# EAGLE board CT_schematic (EAGLE 7.6.0)

Size 100 x 80 mm. Coordinates in mm from the lower left corner, seen from the top.
Outline: 0,0 100,0 100,80 0,80 0,0
Copper layers (1*16): Top 0.035mm / dielectric 1.5mm / Bottom 0.035mm
Design rules "default": minimum track width 10mil, minimum drill 24mil, track to track 8mil, track to pad 8mil, pad to pad 8mil, via to via 8mil, smd to smd 8mil, copper to edge 40mil, drill to drill 8mil, minimum pad ring 10mil, minimum via ring 8mil, stop-mask expansion 4mil, vias tented up to drill 0mil, thermal gap 10mil

## Footprints (pad centres in the part's own frame; a part is rotated, then mirrored left to right if it is on the bottom)
C0603 = smd 0.8 x 0.8: 1 -0.762,0; 2 0.762,0
C0402 = smd 0.5 x 0.5: 1 -0.508,0; 2 0.508,0
C1210 = smd 1.2 x 2.5: 1 -1.524,0; 2 1.524,0
R0603 = smd 0.8 x 0.8: 1 -0.762,0; 2 0.762,0
EXV-9H = smd 3.505 x 1.676: 1 -2.857,0; 2 2.857,0
L0603 = smd 0.8 x 0.8: 1 -0.762,0; 2 0.762,0
IND25X25CZ = smd 2.489 x 3.429: 1 -2.718,0; 2 2.718,0
DR1040 = smd 1.6 x 3.2: 1 -4.458,0; 2 4.458,0
PJ-037B_PACKAGE = drill 3.7 square: 1 12,0 | drill 3.2 square: 2 6,0
UFBGA176_25 = smd 0.3 x 0.3: A1 -4.55,4.55; A2 -3.9,4.55; A3 -3.25,4.55; A4 -2.6,4.55; A5 -1.95,4.55; A6 -1.3,4.55; A7 -0.65,4.55; A8 0,4.55; A9 0.65,4.55; A10 1.3,4.55; A11 1.95,4.55; A12 2.6,4.55; A13 3.25,4.55; A14 3.9,4.55; A15 4.55,4.55; B1 -4.55,3.9; B2 -3.9,3.9; B3 -3.25,3.9; B4 -2.6,3.9; B5 -1.95,3.9; B6 -1.3,3.9; B7 -0.65,3.9; B8 0,3.9; B9 0.65,3.9; B10 1.3,3.9; B11 1.95,3.9; B12 2.6,3.9; B13 3.25,3.9; B14 3.9,3.9; B15 4.55,3.9; C1 -4.55,3.25; C2 -3.9,3.25; C3 -3.25,3.25; C4 -2.6,3.25; C5 -1.95,3.25; C6 -1.3,3.25; C7 -0.65,3.25; C8 0,3.25; C9 0.65,3.25; C10 1.3,3.25; C11 1.95,3.25; C12 2.6,3.25; C13 3.25,3.25; C14 3.9,3.25; C15 4.55,3.25; D1 -4.55,2.6; D2 -3.9,2.6; D3 -3.25,2.6; D4 -2.6,2.6; D5 -1.95,2.6; D6 -1.3,2.6; D7 -0.65,2.6; D8 0,2.6; D9 0.65,2.6; D10 1.3,2.6; D11 1.95,2.6; D12 2.6,2.6; D13 3.25,2.6; D14 3.9,2.6; D15 4.55,2.6; E1 -4.55,1.95; E2 -3.9,1.95; E3 -3.25,1.95; E4 -2.6,1.95; E12 2.6,1.95; E13 3.25,1.95; E14 3.9,1.95; E15 4.55,1.95; F1 -4.55,1.3; F2 -3.9,1.3; F3 -3.25,1.3; F4 -2.6,1.3; F6 -1.3,1.3; F7 -0.65,1.3; F8 0,1.3; F9 0.65,1.3; F10 1.3,1.3; F12 2.6,1.3; F13 3.25,1.3; F14 3.9,1.3; F15 4.55,1.3; G1 -4.55,0.65; G2 -3.9,0.65; G3 -3.25,0.65; G4 -2.6,0.65; G6 -1.3,0.65; G7 -0.65,0.65; G8 0,0.65; G9 0.65,0.65; G10 1.3,0.65; G12 2.6,0.65; G13 3.25,0.65; G14 3.9,0.65; G15 4.55,0.65; H1 -4.55,0; H2 -3.9,0; H3 -3.25,0; H4 -2.6,0; H6 -1.3,0; H7 -0.65,0; H8 0,0; H9 0.65,0; H10 1.3,0; H12 2.6,0; H13 3.25,0; H14 3.9,0; H15 4.55,0; J1 -4.55,-0.65; J2 -3.9,-0.65; J3 -3.25,-0.65; J4 -2.6,-0.65; J6 -1.3,-0.65; J7 -0.65,-0.65; J8 0,-0.65; J9 0.65,-0.65; J10 1.3,-0.65; J12 2.6,-0.65; J13 3.25,-0.65; J14 3.9,-0.65; J15 4.55,-0.65; K1 -4.55,-1.3; K2 -3.9,-1.3; K3 -3.25,-1.3; K4 -2.6,-1.3; K6 -1.3,-1.3; K7 -0.65,-1.3; K8 0,-1.3; K9 0.65,-1.3; K10 1.3,-1.3; K12 2.6,-1.3; K13 3.25,-1.3; K14 3.9,-1.3; K15 4.55,-1.3; L1 -4.55,-1.95; L2 -3.9,-1.95; L3 -3.25,-1.95; L4 -2.6,-1.95; L12 2.6,-1.95; L13 3.25,-1.95; L14 3.9,-1.95; L15 4.55,-1.95; M1 -4.55,-2.6; M2 -3.9,-2.6; M3 -3.25,-2.6; M4 -2.6,-2.6; M5 -1.95,-2.6; M6 -1.3,-2.6; M7 -0.65,-2.6; M8 0,-2.6; M9 0.65,-2.6; M10 1.3,-2.6; M11 1.95,-2.6; M12 2.6,-2.6; M13 3.25,-2.6; M14 3.9,-2.6; M15 4.55,-2.6; N1 -4.55,-3.25; N2 -3.9,-3.25; N3 -3.25,-3.25; N4 -2.6,-3.25; N5 -1.95,-3.25; N6 -1.3,-3.25; N7 -0.65,-3.25; N8 0,-3.25; N9 0.65,-3.25; N10 1.3,-3.25; N11 1.95,-3.25; N12 2.6,-3.25; N13 3.25,-3.25; N14 3.9,-3.25; N15 4.55,-3.25; P1 -4.55,-3.9; P2 -3.9,-3.9; P3 -3.25,-3.9; P4 -2.6,-3.9; P5 -1.95,-3.9; P6 -1.3,-3.9; P7 -0.65,-3.9; P8 0,-3.9; P9 0.65,-3.9; P10 1.3,-3.9; P11 1.95,-3.9; P12 2.6,-3.9; P13 3.25,-3.9; P14 3.9,-3.9; P15 4.55,-3.9; R1 -4.55,-4.55; R2 -3.9,-4.55; R3 -3.25,-4.55; R4 -2.6,-4.55; R5 -1.95,-4.55; R6 -1.3,-4.55; R7 -0.65,-4.55; R8 0,-4.55; R9 0.65,-4.55; R10 1.3,-4.55; R11 1.95,-4.55; R12 2.6,-4.55; R13 3.25,-4.55; R14 3.9,-4.55; R15 4.55,-4.55
A2200-A = smd 1.5 x 0.8: 1 -4.85,6.35; 2 -4.85,5.08; 3 -4.85,3.81; 4 -4.85,2.54; 5 -4.85,1.27; 6 -4.85,0; 7 -4.85,-1.27; 8 -4.85,-2.54; 9 -4.85,-3.81; 10 -4.85,-5.08; 11 -4.85,-6.35; 12 4.85,-6.35; 13 4.85,-5.08; 14 4.85,-3.81; 15 4.85,-2.54; 16 4.85,-1.27; 17 4.85,0; 18 4.85,1.27; 19 4.85,2.54; 20 4.85,3.81; 21 4.85,5.08; 22 4.85,6.35 | smd 1.2 x 1.2: 23 -2,2; 24 -2,0; 25 -2,-2; 26 0,-2; 27 0,0; 28 0,2; 29 2,2; 30 2,0; 31 2,-2
COAXIAL_C = smd 1 x 1: 1 0,-1.5; 2 0,1.5 | smd 1.05 x 2.2: 3 -1.475,0; 4 1.475,0
AT24C02D = smd 1.6 x 0.6: 1 -2.475,1.905 | smd 1.55 x 0.6: 2 -2.475,0.635; 3 -2.475,-0.635; 4 -2.475,-1.905; 5 2.475,-1.905; 6 2.475,-0.635; 7 2.475,0.635; 8 2.475,1.905
PC28F512P33BFD = smd 0.45 x 0.45: A1 0,0; A2 1,0; A3 2,0; A4 3,0; A5 4,0; A6 5,0; A7 6,0; A8 7,0; B1 0,-1; B2 1,-1; B3 2,-1; B4 3,-1; B5 4,-1; B6 5,-1; B7 6,-1; B8 7,-1; C1 0,-2; C2 1,-2; C3 2,-2; C4 3,-2; C5 4,-2; C6 5,-2; C7 6,-2; C8 7,-2; D1 0,-3; D2 1,-3; D3 2,-3; D4 3,-3; D5 4,-3; D6 5,-3; D7 6,-3; D8 7,-3; E1 0,-4; E2 1,-4; E3 2,-4; E4 3,-4; E5 4,-4; E6 5,-4; E7 6,-4; E8 7,-4; F1 0,-5; F2 1,-5; F3 2,-5; F4 3,-5; F5 4,-5; F6 5,-5; F7 6,-5; F8 7,-5; G1 0,-6; G2 1,-6; G3 2,-6; G4 3,-6; G5 4,-6; G6 5,-6; G7 6,-6; G8 7,-6; H1 0,-7; H2 1,-7; H3 2,-7; H4 3,-7; H5 4,-7; H6 5,-7; H7 6,-7; H8 7,-7
USON-8 = smd 0.3 x 0.4: 1 0,0; 2 0.5,0; 3 1,0; 4 1.5,0; 5 1.5,2.4; 6 1,2.4; 7 0.5,2.4; 8 0,2.4 | smd 1.65 x 0.25: 9 0.75,1.2
ABLS-25.000MHZ-B2F-T = smd 5.6 x 2.8: 1 -3.81,0; 2 5.69,0
ASEK = smd 1.4 x 1: 1 -1.1,-0.8; 2 1.1,-0.8; 3 1.1,0.8; 4 -1.1,0.8
IR3899MTR1PBF = smd 0.25 x 0.75: 1 0,0; 2 0.5,0; 3 1,0; 4 1.5,0; 5 2,0; 6 2.5,0; 7 3,0 | smd 0.75 x 0.25: 8 3.425,0.78; 9 3.425,1.28; 10 3.425,1.78; 14 -0.425,1.78; 15 -0.425,1.28; 16 -0.425,0.78 | smd 0.3 x 1.95: 11 3.22,3.63 | smd 1.62 x 2.42: 12 1.786,3.8 | smd 1 x 1.95: 13 0.117,3.63 | smd 2.19 x 1.25: 17 1.51,1.26
HTSSOP14 = smd 1.676 x 0.356: 1 -2.8,1.95; 2 -2.8,1.3; 3 -2.8,0.65; 4 -2.8,0; 5 -2.8,-0.65; 6 -2.8,-1.3; 7 -2.8,-1.95; 8 2.8,-1.95; 9 2.8,-1.3; 10 2.8,-0.65; 11 2.8,0; 12 2.8,0.65; 13 2.8,1.3; 14 2.8,1.95 | smd 3 x 5: 15 0,0 | drill 0.4 pad 0.45: P$1 -0.75,1.5; P$2 0.75,1.5; P$3 -0.75,0; P$4 0.8,0; P$5 -0.75,-1.5; P$6 0.9,-1.5
SOIC-8_EP = smd 1.6 x 0.533: 1 -2.921,1.905; 2 -2.921,0.635; 3 -2.921,-0.635; 4 -2.921,-1.905; 5 2.921,-1.905; 6 2.921,-0.635; 7 2.921,0.635; 8 2.921,1.905 | smd 2.54 x 3.302: EPAD 0,0 | drill 0.406 pad 0.406: P$1 -0.508,0.635; P$2 0.381,0.635; P$3 -0.508,-0.635; P$4 0.381,-0.635
QFN-38_UHF = smd 0.75 x 0.3: 1 -2.4,2.75; 2 -2.4,2.25; 3 -2.4,1.75; 4 -2.4,1.25; 6 -2.4,0.25; 7 -2.4,-0.25; 8 -2.4,-0.75; 9 -2.4,-1.25; 10 -2.4,-1.75; 11 -2.4,-2.25; 12 -2.4,-2.75; 20 2.4,-2.75; 21 2.4,-2.25; 22 2.4,-1.75; 23 2.4,-1.25; 24 2.4,-0.75; 25 2.4,-0.25; 26 2.4,0.25; 27 2.4,0.75; 28 2.4,1.25; 29 2.4,1.75; 30 2.4,2.25; 31 2.4,2.75 | smd 0.758 x 0.3: 5 -2.4,0.75 | smd 0.3 x 0.75: 13 -1.5,-3.4; 14 -1,-3.4; 15 -0.5,-3.4; 16 0,-3.4; 17 0.5,-3.4; 18 1,-3.4; 19 1.5,-3.4; 32 1.5,3.4; 33 1,3.4; 34 0.5,3.4; 35 0,3.4; 36 -0.5,3.4; 37 -1,3.4; 38 -1.5,3.4 | smd 3.2 x 5.2: 39 0,0
IRF8306MTRPBF = smd 0.9 x 1.85: 1 0,0; 2 0,-2.35; 6 6.4,0; 7 6.4,-2.35 | smd 0.75 x 0.75: 3 1.75,-1.175 | smd 1.45 x 0.87: 4 3.5,-0.565; 5 3.5,-1.785
DCU0008A_N = smd 0.5 x 0.3: 1 -1.6,0.75; 2 -1.6,0.25; 3 -1.6,-0.25; 4 -1.6,-0.75; 5 1.6,-0.75; 6 1.6,-0.25; 7 1.6,0.25; 8 1.6,0.75
SW_4-1437565-2 = smd 1.4 x 2.1: 1 -2.23,4.55; 2 -2.23,-4.55; 3 2.23,4.55; 4 2.23,-4.55
LGM67K-G1J2-24-Z = smd 0.8 x 1.4: A -2,0; C 0,0
NC7SZ125M5X = smd 1.3 x 0.7: 1 -1.3,0.95; 2 -1.3,0; 3 -1.3,-0.95; 4 1.3,-0.95; 5 1.3,0.95
DUMMY_PACKAGE_318 = drill 0.3: 1 0,-1; 2 1.5,-1; 3 3,-1

## Placement (x,y rotation side)
C1  1e-06  [C0603]  -30.48,77.47 0 top  (outside the outline)
C2  1e-07  [C0603]  -34.29,77.47 0 top  (outside the outline)
C3  1e-07  [C0603]  -38.1,77.47 0 top  (outside the outline)
C4  1e-07  [C0603]  -41.91,77.47 0 top  (outside the outline)
C5  1e-07  [C0603]  -45.72,77.47 0 top  (outside the outline)
C6  1e-07  [C0603]  -49.53,77.47 0 top  (outside the outline)
C7  1e-07  [C0603]  -53.34,77.47 0 top  (outside the outline)
C8  1e-07  [C0603]  -57.15,77.47 0 top  (outside the outline)
C9  1e-07  [C0603]  -60.96,77.47 0 top  (outside the outline)
C10  1e-07  [C0603]  -64.77,77.47 0 top  (outside the outline)
C11  1e-07  [C0603]  -68.58,77.47 0 top  (outside the outline)
C12  1e-07  [C0603]  -72.39,77.47 0 top  (outside the outline)
C13  1e-07  [C0603]  -76.2,77.47 0 top  (outside the outline)
C14  1e-07  [C0603]  -80.01,77.47 0 top  (outside the outline)
C15  1e-07  [C0603]  -83.82,77.47 0 top  (outside the outline)
C16  1e-07  [C0603]  -87.63,77.47 0 top  (outside the outline)
C17  4.7e-06  [C0603]  -15.24,77.47 0 top  (outside the outline)
C18  1e-07  [C0603]  -15.24,82.55 0 top  (outside the outline)
C19  1e-08  [C0603]  -19.05,82.55 0 top  (outside the outline)
C20  1e-06  [C0603]  -22.86,82.55 0 top  (outside the outline)
C21  1e-07  [C0603]  -26.67,82.55 0 top  (outside the outline)
C22  1e-07  [C0603]  -30.48,82.55 0 top  (outside the outline)
C23  1e-07  [C0603]  -34.29,82.55 0 top  (outside the outline)
C24  1e-11  [C0402]  -15.24,87.63 0 top  (outside the outline)
C25  1e-11  [C0402]  -19.05,87.63 0 top  (outside the outline)
C26  1e-07  [C0402]  -22.86,87.63 0 top  (outside the outline)
C27  1e-08  [C0402]  -26.67,87.63 0 top  (outside the outline)
C28  1e-07  [C0402]  -30.48,87.63 0 top  (outside the outline)
C29  1e-08  [C0402]  -34.29,87.63 0 top  (outside the outline)
C30  1e-07  [C0402]  -38.1,87.63 0 top  (outside the outline)
C31  1e-08  [C0402]  -41.91,87.63 0 top  (outside the outline)
C32  1e-07  [C0402]  -45.72,87.63 0 top  (outside the outline)
C33  1e-08  [C0402]  -49.53,87.63 0 top  (outside the outline)
C34  1e-07  [C0402]  -53.34,87.63 0 top  (outside the outline)
C35  1e-08  [C0402]  -57.15,87.63 0 top  (outside the outline)
C36  0.0001  [C1210]  -85.09,43.18 0 top  (outside the outline)
C37  2.2e-06  [C0603]  -19.05,77.47 0 top  (outside the outline)
C38  1e-07  [C0402]  -60.96,87.63 0 top  (outside the outline)
C39  1e-07  [C0402]  -64.77,87.63 0 top  (outside the outline)
C40  8.6971073877236e-09  [R0603]  -20.32,57.15 0 top  (outside the outline)
C41  2.9649229730876e-07  [R0603]  -30.48,57.15 0 top  (outside the outline)
C44  1e-06  [C0603]  -38.1,82.55 0 top  (outside the outline)
C45  3.3e-09  [C0402]  -88.9,82.55 0 top  (outside the outline)
C46  1e-07  [C0402]  -68.58,87.63 0 top  (outside the outline)
C47  2.2e-05  [C1210]  -16.51,52.07 0 top  (outside the outline)
C48  2.2e-05  [C1210]  -22.86,52.07 0 top  (outside the outline)
C49  1e-05  [C1210]  -29.21,52.07 0 top  (outside the outline)
C50  1e-05  [C1210]  -35.56,52.07 0 top  (outside the outline)
C51  1e-05  [C1210]  -41.91,52.07 0 top  (outside the outline)
C52  1e-05  [C1210]  -48.26,52.07 0 top  (outside the outline)
C53  1e-05  [C1210]  -54.61,52.07 0 top  (outside the outline)
C54  1e-05  [C1210]  -60.96,52.07 0 top  (outside the outline)
C55  0.0001  [C1210]  -67.31,52.07 0 top  (outside the outline)
C56  2.2e-06  [C0603]  -22.86,77.47 0 top  (outside the outline)
C57  1e-07  [C0402]  -72.39,87.63 0 top  (outside the outline)
C58  1e-07  [C0402]  -76.2,87.63 0 top  (outside the outline)
C59  8.6971073877236e-09  [R0603]  -40.64,57.15 0 top  (outside the outline)
C60  2.9649229730876e-07  [R0603]  -50.8,57.15 0 top  (outside the outline)
C63  1e-07  [C0402]  -80.01,87.63 0 top  (outside the outline)
C64  2.2e-06  [C0603]  -26.67,77.47 0 top  (outside the outline)
C65  2.45e-08  [R0603]  -20.32,67.31 0 top  (outside the outline)
C66  2.8258362168397e-09  [R0603]  -60.96,57.15 0 top  (outside the outline)
C67  7.105e-09  [R0603]  -69.85,62.23 0 top  (outside the outline)
C68  0.0001  [EXV-9H]  -73.66,35.56 0 top  (outside the outline)
C69  0.0001  [EXV-9H]  -85.09,35.56 0 top  (outside the outline)
C70  1e-08  [C0402]  -83.82,87.63 0 top  (outside the outline)
C71  1e-07  [C0402]  -87.63,87.63 0 top  (outside the outline)
C72  1e-08  [C0402]  -15.24,92.71 0 top  (outside the outline)
C73  1e-07  [C0402]  -19.05,92.71 0 top  (outside the outline)
C74  1e-08  [C0402]  -22.86,92.71 0 top  (outside the outline)
C75  1e-08  [C0402]  -26.67,92.71 0 top  (outside the outline)
C76  1e-08  [C0402]  -30.48,92.71 0 top  (outside the outline)
F1  240.0  [L0603]  -41.91,82.55 0 top  (outside the outline)
I1  6.8e-07  [IND25X25CZ]  -38.1,44.45 0 top  (outside the outline)
I2  7e-06  [DR1040]  -19.05,25.4 0 top  (outside the outline)
I3  6.8e-07  [IND25X25CZ]  -46.99,44.45 0 top  (outside the outline)
J1  PJ-037B  [PJ-037B_PACKAGE]  -54.61,7.62 0 top  (outside the outline)
R2  1000.0  [R0603]  -45.72,82.55 0 top  (outside the outline)
R7  4700.0  [R0603]  -49.53,82.55 0 top  (outside the outline)
R8  4700.0  [R0603]  -53.34,82.55 0 top  (outside the outline)
R9  4700.0  [R0603]  -57.15,82.55 0 top  (outside the outline)
R14  2200.0  [R0603]  -60.96,82.55 0 top  (outside the outline)
R16  2200.0  [R0603]  -64.77,82.55 0 top  (outside the outline)
R18  10000.0  [R0603]  -25.4,67.31 0 top  (outside the outline)
R19  10000.0  [R0603]  -30.48,67.31 0 top  (outside the outline)
R20  10000.0  [R0603]  -35.56,67.31 0 top  (outside the outline)
R21  10000.0  [R0603]  -40.64,67.31 0 top  (outside the outline)
R22  10000.0  [R0603]  -45.72,67.31 0 top  (outside the outline)
R23  10000.0  [R0603]  -50.8,67.31 0 top  (outside the outline)
R24  10000.0  [R0603]  -55.88,67.31 0 top  (outside the outline)
R25  10000.0  [R0603]  -60.96,67.31 0 top  (outside the outline)
R26  10000.0  [R0603]  -66.04,67.31 0 top  (outside the outline)
R27  10000.0  [R0603]  -71.12,67.31 0 top  (outside the outline)
R28  10000.0  [R0603]  -76.2,67.31 0 top  (outside the outline)
R29  10000.0  [R0603]  -81.28,67.31 0 top  (outside the outline)
R30  10000.0  [R0603]  -86.36,67.31 0 top  (outside the outline)
R31  100000.0  [R0603]  -74.93,62.23 0 top  (outside the outline)
R32  100000.0  [R0603]  -80.01,62.23 0 top  (outside the outline)
R33  100000.0  [R0603]  -85.09,62.23 0 top  (outside the outline)
R34  0.1  [R0603]  -68.58,82.55 0 top  (outside the outline)
R35  4030.2416170974  [R0603]  -68.58,57.15 0 top  (outside the outline)
R36  2878.7440122125  [R0603]  -76.2,57.15 0 top  (outside the outline)
R37  58.613333333333  [R0603]  -83.82,57.15 0 top  (outside the outline)
R38  130.0  [R0603]  -72.39,82.55 0 top  (outside the outline)
R39  39000.0  [R0603]  -15.24,72.39 0 top  (outside the outline)
R40  49900.0  [R0603]  -20.32,72.39 0 top  (outside the outline)
R41  5147.5789473684  [R0603]  -19.05,62.23 0 top  (outside the outline)
R42  30000.0  [R0603]  -25.4,72.39 0 top  (outside the outline)
R43  22000.0  [R0603]  -30.48,72.39 0 top  (outside the outline)
R44  4031.5447154472  [R0603]  -26.67,62.23 0 top  (outside the outline)
R45  2200.0  [R0603]  -76.2,82.55 0 top  (outside the outline)
R46  0.1  [R0603]  -80.01,82.55 0 top  (outside the outline)
R47  4030.2416170974  [R0603]  -34.29,62.23 0 top  (outside the outline)
R48  2878.7440122125  [R0603]  -41.91,62.23 0 top  (outside the outline)
R49  58.613333333333  [R0603]  -49.53,62.23 0 top  (outside the outline)
R50  130.0  [R0603]  -83.82,82.55 0 top  (outside the outline)
R51  39000.0  [R0603]  -35.56,72.39 0 top  (outside the outline)
R52  49900.0  [R0603]  -40.64,72.39 0 top  (outside the outline)
R53  5147.5789473684  [R0603]  -57.15,62.23 0 top  (outside the outline)
R54  10000.0  [R0603]  -45.72,72.39 0 top  (outside the outline)
R55  75000.0  [R0603]  -50.8,72.39 0 top  (outside the outline)
R56  10000.0  [R0603]  -55.88,72.39 0 top  (outside the outline)
R57  10000.0  [R0603]  -60.96,72.39 0 top  (outside the outline)
R58  95300.0  [R0603]  -66.04,72.39 0 top  (outside the outline)
R59  95300.0  [R0603]  -71.12,72.39 0 top  (outside the outline)
R60  10000.0  [R0603]  -76.2,72.39 0 top  (outside the outline)
R61  10000.0  [R0603]  -81.28,72.39 0 top  (outside the outline)
R62  10000.0  [R0603]  -86.36,72.39 0 top  (outside the outline)
R63  139872.72727273  [R0603]  -64.77,62.23 0 top  (outside the outline)
R64  200000.0  [R0603]  -15.24,67.31 0 top  (outside the outline)
U1  STM32F777IIK7  [UFBGA176_25]  -31.75,6.35 0 top  (outside the outline)
U2  A2200-A  [A2200-A]  -19.05,10.16 0 top  (outside the outline)
U3  73412-0114  [COAXIAL_C]  -36.83,35.56 0 top  (outside the outline)
U4  AT24C02D-SSHM-T  [AT24C02D]  -67.31,24.13 0 top  (outside the outline)
U5  PC28F512P33BFD  [PC28F512P33BFD]  -71.12,10.16 0 top  (outside the outline)
U6  SST26WF080BT-104I/NP  [USON-8]  -34.29,91.44 0 top  (outside the outline)
U7  ABLS-25.000MHZ-B2F-T  [ABLS-25.000MHZ-B2F-T]  -26.67,44.45 0 top  (outside the outline)
U8  ASEK-32.768KHz-ECST  [ASEK]  -64.77,35.56 0 top  (outside the outline)
U9  IR3899MTR1PBF  [IR3899MTR1PBF]  -36.83,22.86 0 top  (outside the outline)
U10  tps54225PWP  [HTSSOP14]  -64.77,43.18 0 top  (outside the outline)
U11  MIC5234YME  [SOIC-8_EP]  -55.88,43.18 0 top  (outside the outline)
U12  IR3899MTR1PBF  [IR3899MTR1PBF]  -52.07,22.86 0 top  (outside the outline)
U13  LTC2928CUHF#PBF  [QFN-38_UHF]  -43.18,35.56 0 top  (outside the outline)
U14  IRF8306MTRPbF  [IRF8306MTRPBF]  -85.09,25.4 0 top  (outside the outline)
U15  IRF8306MTRPbF  [IRF8306MTRPBF]  -26.67,36.83 0 top  (outside the outline)
U16  LSF0102DCTR  [DCU0008A_N]  -52.07,91.44 0 top  (outside the outline)
U17  4-1437565-2  [SW_4-1437565-2]  -87.63,6.35 0 top  (outside the outline)
U18  Q65110A2395  [LGM67K-G1J2-24-Z]  -73.66,43.18 0 top  (outside the outline)
U19  nc7sz125m5x  [NC7SZ125M5X]  -72.39,50.8 0 top  (outside the outline)
U20  nc7sz125m5x  [NC7SZ125M5X]  -78.74,50.8 0 top  (outside the outline)
U21  nc7sz125m5x  [NC7SZ125M5X]  -85.09,50.8 0 top  (outside the outline)
U22  Dummy  [DUMMY_PACKAGE_318]  -39.37,92.71 0 top  (outside the outline)

## Library data of the parts
C1-C41 C44-C60 C63-C76 F1 I1-I3 J1 R2 R7-R9 R14 R16 R18-R64 U1-U22 = circuit_tree

## Nets
CLK_CRYSTAL_U1_G1: C24.1 U1.G1 U7.1
CLK_CRYSTAL_U1_H1: C25.1 U1.H1 U7.2
CLK_U1_E1: U1.E1 U8.3
GND: C1.2 C2.2 C3.2 C4.2 C5.2 C6.2 C7.2 C8.2 C9.2 C10.2 C11.2 C12.2 C13.2 C14.2 C15.2 C16.2 C17.2 C18.2 C19.2 C20.2 C21.2 C22.2 C23.2 C24.2 C25.2 C26.2 C27.2 C28.2 C29.2 C30.2 C31.2 C32.2 C33.2 C34.2 C35.2 C37.2 C38.2 C39.2 C44.2 C45.2 C47.2 C48.2 C49.2 C50.2 C51.2 C52.2 C53.2 C54.2 C56.2 C57.2 C58.2 C63.2 C64.2 C65.2 C66.2 C67.2 C68.2 C69.2 C70.2 C71.2 C72.2 C73.2 C74.2 C75.2 C76.2 J1.2 R2.2 R18.2 R22.2 R24.2 R25.2 R34.1 R34.2 R36.2 R39.2 R41.2 R43.2 R45.2 R46.1 R46.2 R48.2 R51.2 R53.2 R55.2 R58.2 R59.2 R60.2 R61.2 R62.2 U1.D5 U1.D7 U1.D8 U1.D9 U1.F2 U1.F6 U1.F7 U1.F8 U1.F9 U1.F10 U1.F12 U1.G2 U1.G6 U1.G7 U1.G8 U1.G9 U1.G10 U1.G12 U1.H6 U1.H7 U1.H8 U1.H9 U1.H10 U1.H12 U1.J6 U1.J7 U1.J8 U1.J9 U1.J10 U1.K6 U1.K7 U1.K8 U1.K9 U1.K10 U1.M1 U1.M8 U1.M9 U1.N1 U2.7 U2.8 U2.23 U2.24 U2.25 U2.26 U2.27 U2.28 U2.29 U2.30 U2.31 U4.4 U5.B2 U5.H2 U5.H4 U5.H6 U6.4 U6.9 U8.2 U9.4 U9.11 U9.17 U10.5 U10.8 U10.9 U10.15 U11.7 U11.EPAD U12.4 U12.11 U12.17 U13.8 U13.9 U13.10 U13.12 U13.13 U13.24 U13.25 U13.30 U13.32 U13.39 U16.1 U18.C U19.1 U19.3 U20.1 U20.3 U21.1 U21.3 U22.1
NET_U1_A5: U16.4
NET_U1_B4: U16.3
NET_U1_C6: R19.1 U1.C6
NET_U1_D6: R18.1 U1.D6
NET_U1_F13: C23.1 U1.F13
NET_U1_H4: R14.1 U1.H4 U4.6
NET_U1_J1: R9.1 U1.J1 U21.4
NET_U1_J4: R16.1 U1.J4 U4.5
NET_U1_L4: R20.1 U1.L4
NET_U1_R1: C19.1 C20.1 F1.1 U1.P1 U1.R1
NET_U1_R14: U18.A
NET_U1_R15: U17.3 U17.4
NET_U2_2: R21.2 U2.2
NET_U2_6: U2.6
NET_U2_17: R21.1 U2.17
NET_U2_19: U2.19
NET_U2_22: R8.1 U2.22 U20.4
NET_U3_1: U2.11 U3.1
NET_U3_2: U2.10 U3.2 U3.3 U3.4
NET_U4_1: R23.1 U4.1
NET_U4_2: R24.1 U4.2
NET_U4_3: R25.1 U4.3
NET_U4_7: R22.1 U4.7
NET_U5_A4: C32.1 C33.1 U5.A4
NET_U5_B4: R27.1 U5.B4
NET_U5_C6: R29.1 U5.C6
NET_U5_D4: R7.1 U5.D4 U19.4
NET_U5_F6: R26.1 U5.F6
NET_U5_F8: R28.1 U5.F8
NET_U5_G8: R30.1 U5.G8
NET_U9_1: C40.1 R35.1 R36.1 R37.1 R38.1 U9.1 U9.8
NET_U9_2: C39.1 U9.2
NET_U9_3: C40.2 C41.1 C41.2 U9.3
NET_U9_5: R39.1 U9.5
NET_U9_10: C37.1 U9.10
NET_U9_12: C36.1 I1.1 U9.12
NET_U9_13: U9.13
NET_U9_14: C36.2 U9.14
NET_U9_15: R40.1 R41.1 U9.15
NET_U9_ATNET_3: I1.2 R35.2
NET_U9_ATNET_4: C41.2 R37.2
NET_U9_ATNET_5: R38.2
NET_U10_2: R42.2 R43.1 U10.2
NET_U10_3: C44.1 U10.3
NET_U10_4: C45.1 U10.4
NET_U10_10: C46.1 I2.1 U10.10 U10.11
NET_U10_12: C46.2 U10.12
NET_U11_4: R44.2 R45.1 U11.4
NET_U12_1: C59.1 R47.1 R48.1 R49.1 R50.1 U12.1 U12.8
NET_U12_2: C58.1 U12.2
NET_U12_3: C59.2 C60.1 C60.2 U12.3
NET_U12_5: R51.1 U12.5
NET_U12_10: C56.1 U12.10
NET_U12_12: C55.1 I3.1 U12.12
NET_U12_13: U12.13
NET_U12_14: C55.2 U12.14
NET_U12_15: R52.1 R53.1 U12.15
NET_U12_ATNET_3: I3.2 R47.2
NET_U12_ATNET_4: C60.2 R49.2
NET_U12_ATNET_5: R50.2
NET_U13_3: R61.1 U13.3
NET_U13_6: R58.1 U13.6
NET_U13_7: R59.1 U13.7
NET_U13_16: R60.1 R63.1 U13.16
NET_U13_18: R57.1 U13.18
NET_U13_19: R56.1 U13.19 U13.20
NET_U13_21: R54.1 R55.1 U13.21 U19.2 U20.2 U21.2
NET_U13_26: C66.1 U13.26
NET_U13_27: C65.1 U13.27
NET_U13_28: C67.1 U13.28
NET_U13_38: R62.1 U13.38
NET_U14_3: U13.2 U14.3
NET_U15_3: U13.37 U15.3
NET_U16_8: R64.1 U16.8
NET_U17_1: R2.1 U17.1 U17.2
PROC_I2C1_SCL_TOXCVR: U2.15 U16.5
PROC_I2C1_SDA_TOXCVR: U2.16 U16.6
PROC_PE2: U1.A2 U22.3
PROC_PE3: U1.A1 U22.2
PROC_QUADSPI_BK1_IO0: U1.F14 U6.5
PROC_QUADSPI_BK1_IO1: U1.B14 U6.2
PROC_QUADSPI_BK1_IO2: R32.1 U1.K1 U6.3
PROC_QUADSPI_BK1_IO3: R33.1 U1.K2 U6.7
PROC_QUADSPI_BK1_NCS: R31.1 U1.B6 U6.1
PROC_QUADSPI_CLK: U1.L1 U6.6
VCC_16V8: C63.1 C64.1 C68.1 C69.1 J1.1 R54.2 R56.2 R57.2 R63.2 U13.11 U13.22 U14.1 U14.2 U14.6 U14.7 U15.1 U15.2 U15.6 U15.7
VCC_S1_16V8: C38.1 C49.1 C50.1 C51.1 C52.1 R40.2 U9.9 U10.7 U10.13 U10.14 U11.5 U11.8 U14.4 U14.5
VCC_S2_16V8: C57.1 R52.2 U12.9 U15.4 U15.5
VCC_TIER1_1V2: C22.1 I1.2 R35.2 U1.M10
VCC_TIER1_1V8: C1.1 C2.1 C3.1 C4.1 C5.1 C6.1 C7.1 C8.1 C9.1 C10.1 C11.1 C12.1 C13.1 C14.1 C15.1 C16.1 C17.1 C18.1 C27.1 C34.1 C47.1 C48.1 C72.1 C73.1 C74.1 C75.1 C76.1 F1.2 I2.2 R9.2 R14.2 R16.2 R19.2 R20.2 R23.2 R31.2 R32.2 R33.2 R42.1 U1.C1 U1.C5 U1.C7 U1.C8 U1.C9 U1.F3 U1.G3 U1.G13 U1.J12 U1.J13 U1.K4 U1.N8 U1.N9 U1.N10 U4.8 U6.8 U10.1 U16.2 U19.5 U20.5 U21.5
VCC_TIER1_3V3: C21.1 C26.1 C28.1 C29.1 C30.1 C31.1 C35.1 C53.1 C54.1 C70.1 C71.1 R7.2 R8.2 R26.2 R27.2 R28.2 R29.2 R30.2 R44.1 R64.2 U1.H13 U2.20 U5.A6 U5.D5 U5.D6 U5.G4 U5.H3 U8.4 U11.1 U16.7
VCC_TIER2_1V2: I3.2 R47.2

## Tracks (layer width: path | path; a pad name or v marks a point on that pad's centre or on a via)
CLK_CRYSTAL_U1_G1  (2 unrouted)
CLK_CRYSTAL_U1_H1  (2 unrouted)
CLK_U1_E1  (1 unrouted)
GND  (176 unrouted)
NET_U1_C6  (1 unrouted)
NET_U1_D6  (1 unrouted)
NET_U1_F13  (1 unrouted)
NET_U1_H4  (2 unrouted)
NET_U1_J1  (2 unrouted)
NET_U1_J4  (2 unrouted)
NET_U1_L4  (1 unrouted)
NET_U1_R1  (4 unrouted)
NET_U1_R15  (1 unrouted)
NET_U2_2  (1 unrouted)
NET_U2_17  (1 unrouted)
NET_U2_22  (2 unrouted)
NET_U3_1  (1 unrouted)
NET_U3_2  (3 unrouted)
NET_U4_1  (1 unrouted)
NET_U4_2  (1 unrouted)
NET_U4_3  (1 unrouted)
NET_U4_7  (1 unrouted)
NET_U5_A4  (2 unrouted)
NET_U5_B4  (1 unrouted)
NET_U5_C6  (1 unrouted)
NET_U5_D4  (2 unrouted)
NET_U5_F6  (1 unrouted)
NET_U5_F8  (1 unrouted)
NET_U5_G8  (1 unrouted)
NET_U9_1  (6 unrouted)
NET_U9_2  (1 unrouted)
NET_U9_3  (3 unrouted)
NET_U9_5  (1 unrouted)
NET_U9_10  (1 unrouted)
NET_U9_12  (2 unrouted)
NET_U9_14  (1 unrouted)
NET_U9_15  (2 unrouted)
NET_U9_ATNET_3  (1 unrouted)
NET_U9_ATNET_4  (1 unrouted)
NET_U10_2  (2 unrouted)
NET_U10_3  (1 unrouted)
NET_U10_4  (1 unrouted)
NET_U10_10  (3 unrouted)
NET_U10_12  (1 unrouted)
NET_U11_4  (2 unrouted)
NET_U12_1  (6 unrouted)
NET_U12_2  (1 unrouted)
NET_U12_3  (3 unrouted)
NET_U12_5  (1 unrouted)
NET_U12_10  (1 unrouted)
NET_U12_12  (2 unrouted)
NET_U12_14  (1 unrouted)
NET_U12_15  (2 unrouted)
NET_U12_ATNET_3  (1 unrouted)
NET_U12_ATNET_4  (1 unrouted)
NET_U13_3  (1 unrouted)
NET_U13_6  (1 unrouted)
NET_U13_7  (1 unrouted)
NET_U13_16  (2 unrouted)
NET_U13_18  (1 unrouted)
NET_U13_19  (2 unrouted)
NET_U13_21  (5 unrouted)
NET_U13_26  (1 unrouted)
NET_U13_27  (1 unrouted)
NET_U13_28  (1 unrouted)
NET_U13_38  (1 unrouted)
NET_U14_3  (1 unrouted)
NET_U15_3  (1 unrouted)
NET_U16_8  (1 unrouted)
NET_U17_1  (2 unrouted)
PROC_I2C1_SCL_TOXCVR  (1 unrouted)
PROC_I2C1_SDA_TOXCVR  (1 unrouted)
PROC_PE2  (1 unrouted)
PROC_PE3  (1 unrouted)
PROC_QUADSPI_BK1_IO0  (1 unrouted)
PROC_QUADSPI_BK1_IO1  (1 unrouted)
PROC_QUADSPI_BK1_IO2  (2 unrouted)
PROC_QUADSPI_BK1_IO3  (2 unrouted)
PROC_QUADSPI_BK1_NCS  (2 unrouted)
PROC_QUADSPI_CLK  (1 unrouted)
VCC_16V8  (18 unrouted)
VCC_S1_16V8  (13 unrouted)
VCC_S2_16V8  (4 unrouted)
VCC_TIER1_1V2  (3 unrouted)
VCC_TIER1_1V8  (59 unrouted)
VCC_TIER1_3V3  (29 unrouted)
VCC_TIER2_1V2  (1 unrouted)